# EAGLE board Daughter Card v6-2 (EAGLE 7.7.0)
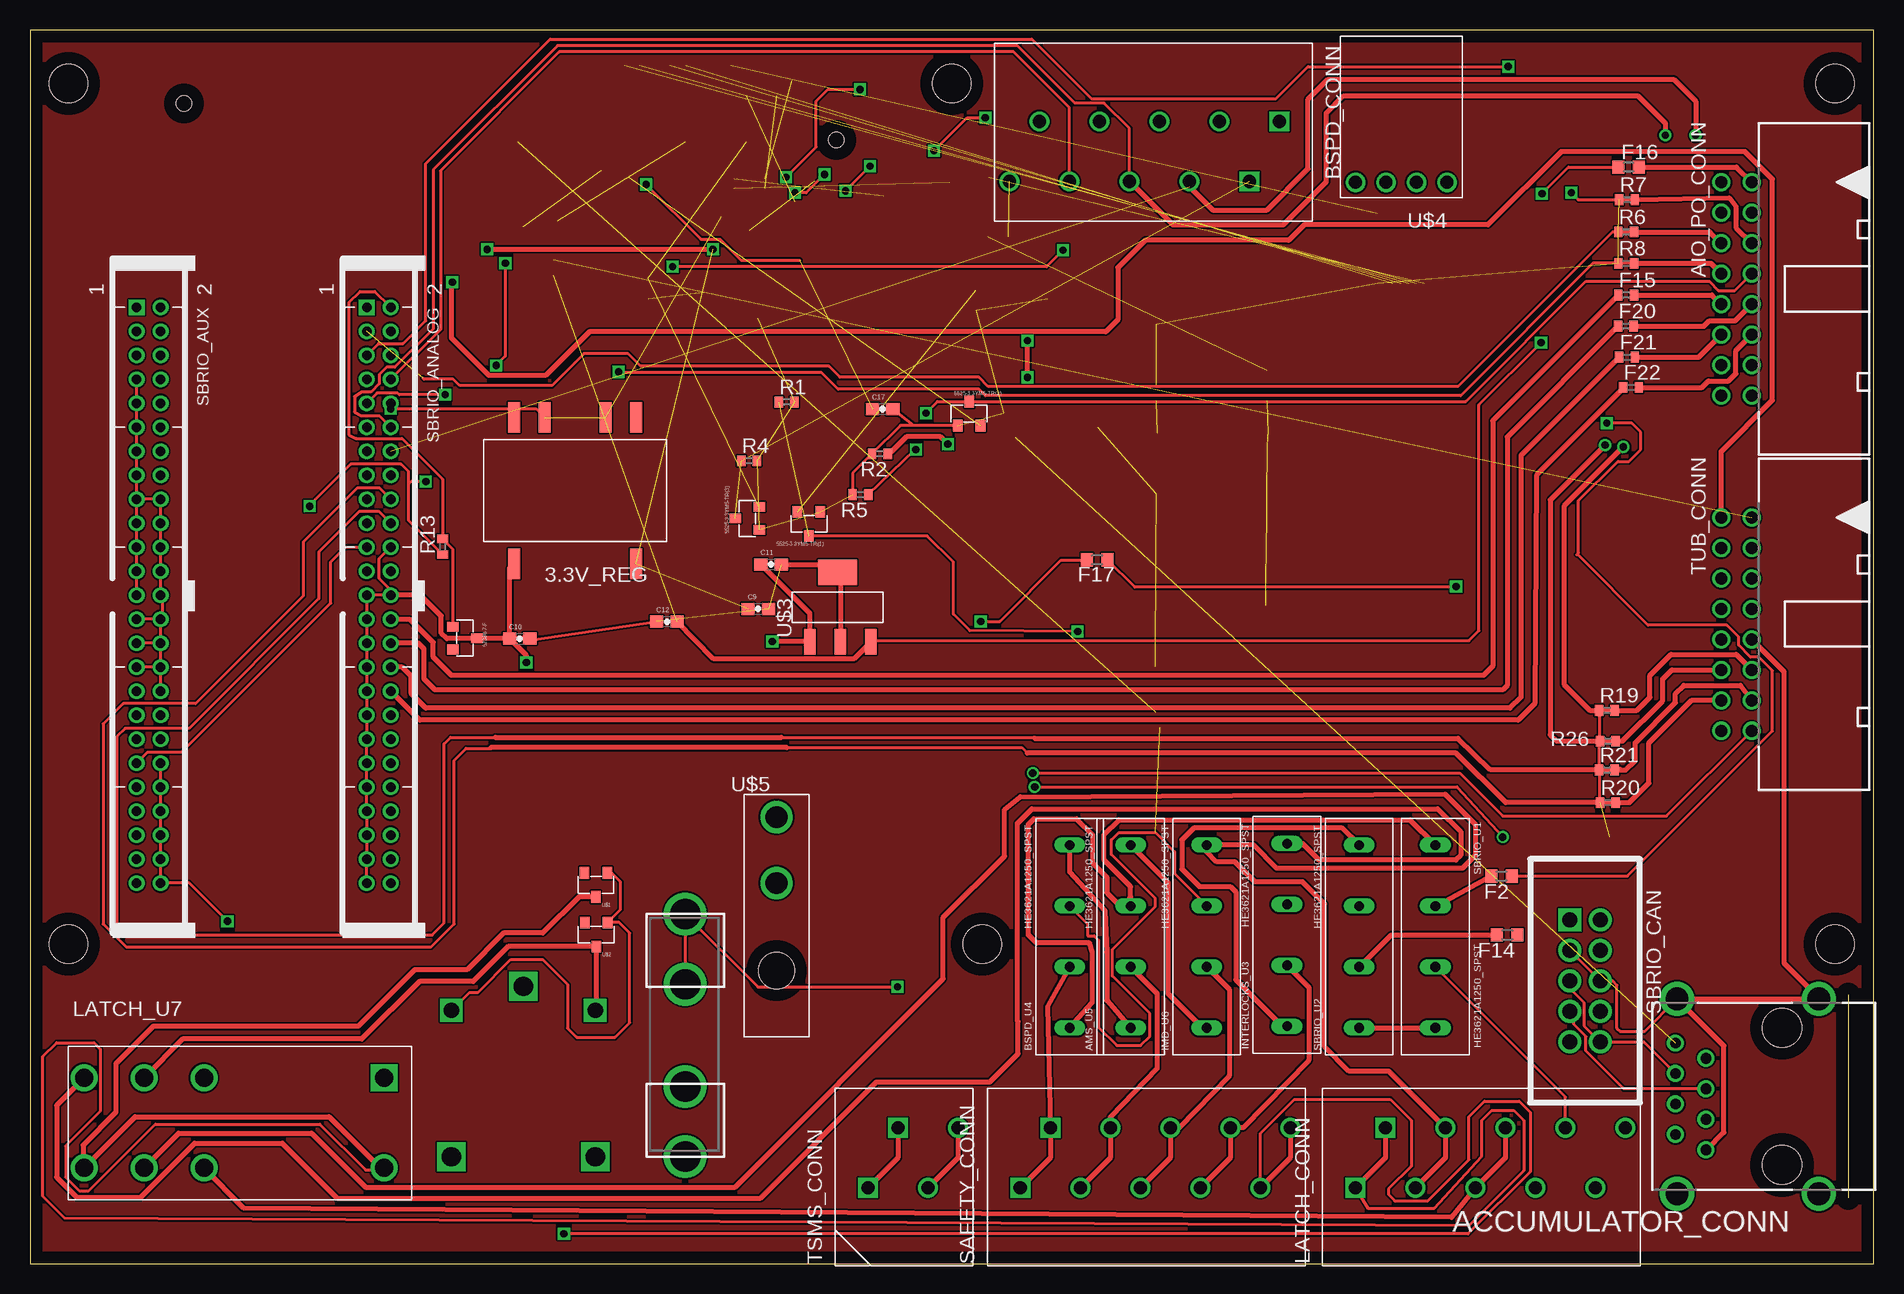
[diagram p0: board, top side]
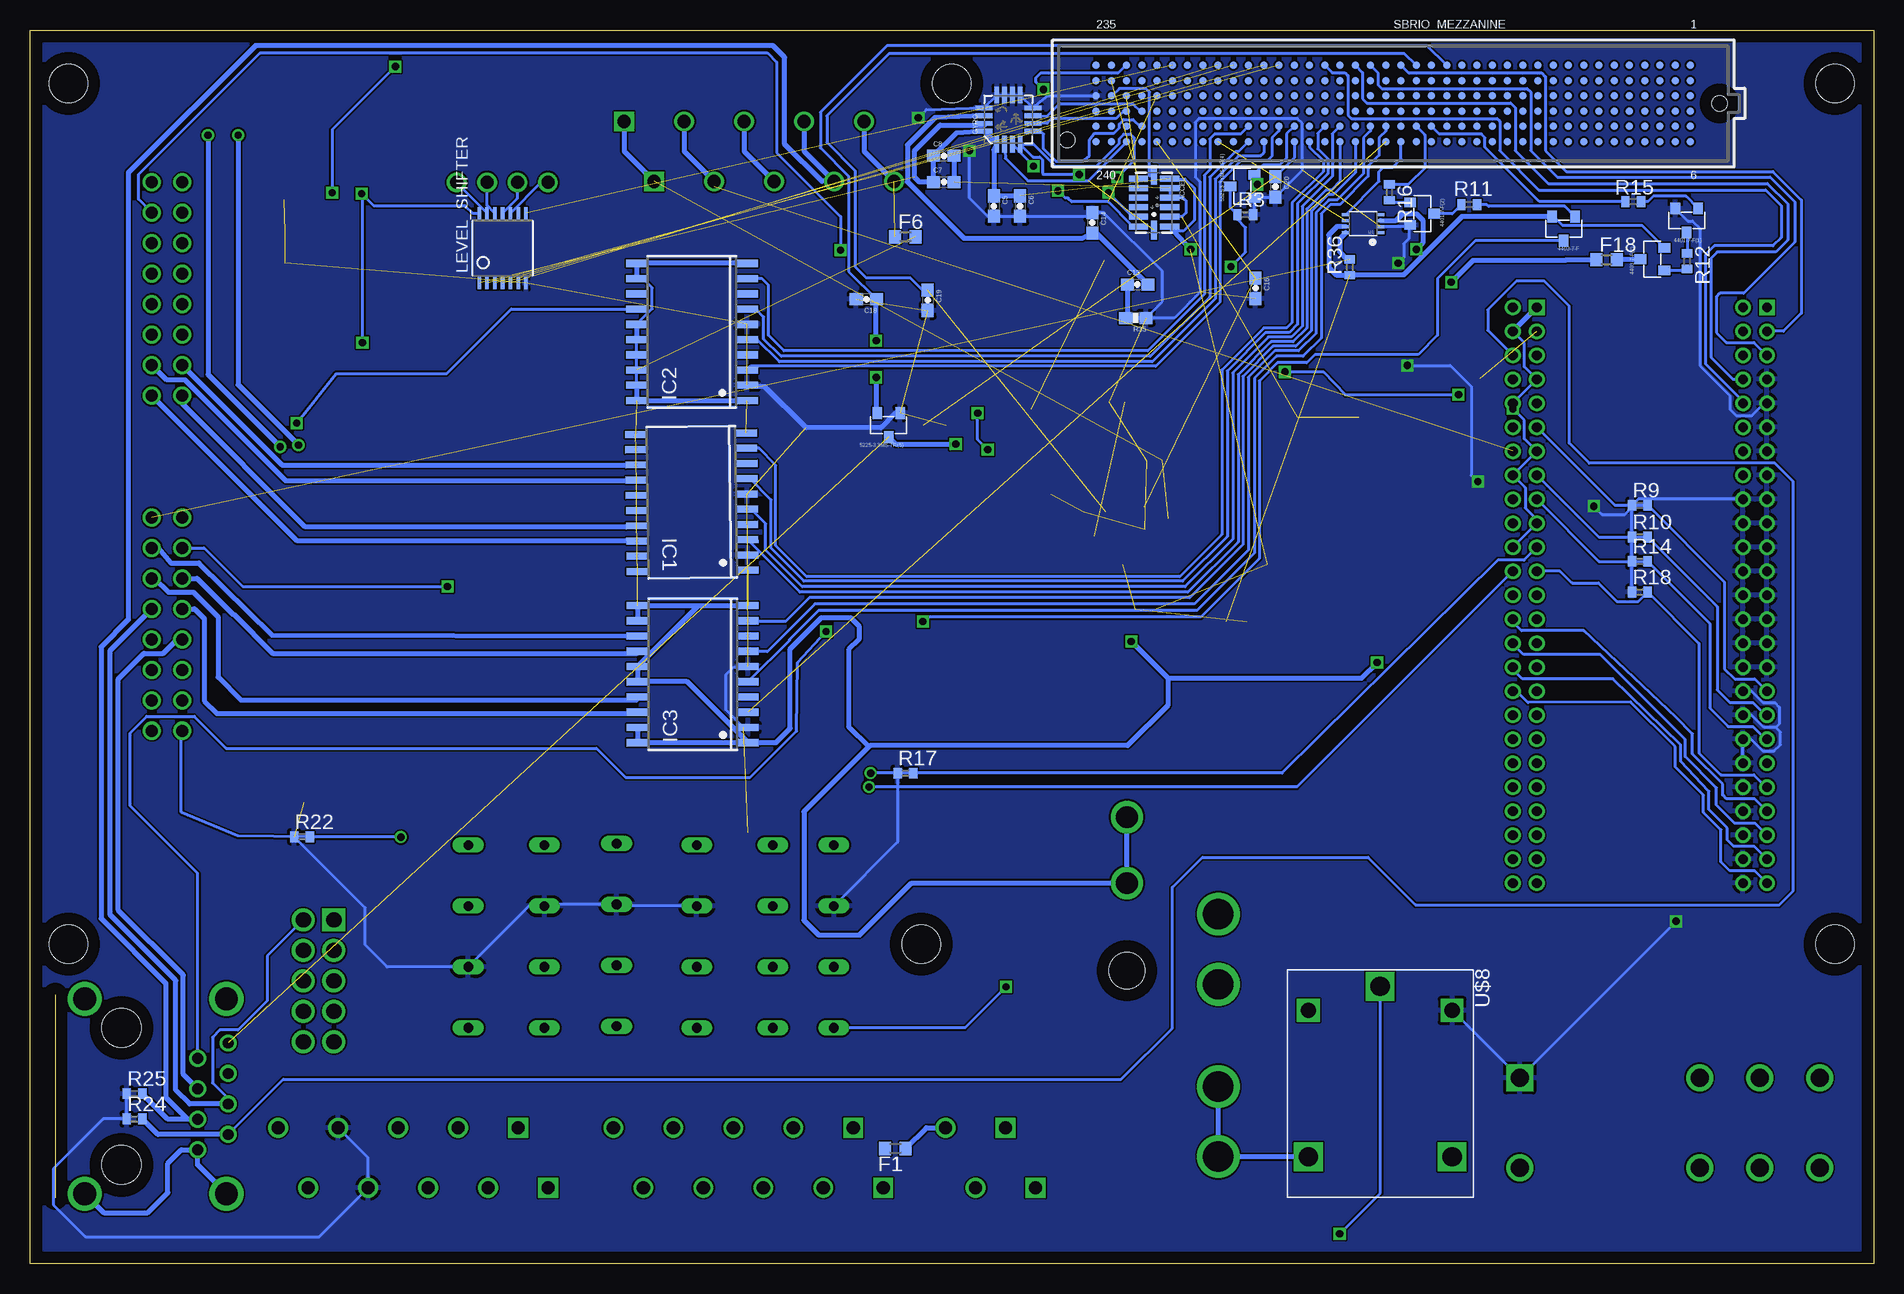
[diagram p1: board, bottom side, seen from below]

Size 153.67 x 102.87 mm. Coordinates in mm from the lower left corner, seen from the top.
Outline: 0,0 153.67,0 153.67,102.87 0,102.87 0,0
Copper layers (1*16): Top 0.035mm / dielectric 1.5mm / Bottom 0.035mm
Design rules "default *": minimum track width 8mil, minimum drill 13mil, track to track 6mil, track to pad 6mil, pad to pad 8mil, via to via 8mil, smd to smd 8mil, copper to edge 40mil, drill to drill 8mil, minimum pad ring 10mil, minimum via ring 8mil, stop-mask expansion 4mil, vias tented up to drill 0mil, thermal gap 10mil
Holes 3.17 mm at 3.2,98.4 76.83,98.4 150.47,98.4 150.47,26.67 79.38,26.67 3.2,26.67

## Footprints (pad centres in the part's own frame; a part is rotated, then mirrored left to right if it is on the bottom)
V78XX-1000 = smd 1 x 2.54: 1 -5.08,-6.096; 5 5.08,-6.096; 6 5.08,6.096; 7 2.54,6.096; 9 -2.54,6.096; 10 -5.08,6.096
SOT-23-3 = smd 0.8 x 0.976: P$1 0,1; P$2 -0.95,-1; P$3 0.95,-1
LGA14 = smd 0.5 x 1.6: 1 2,1.3; 2 1.2,1.3; 3 0.4,1.3; 4 -0.4,1.3; 5 -1.2,1.3; 6 -2,1.3; 8 -2,-1.3; 9 -1.2,-1.3; 10 -0.4,-1.3; 11 0.4,-1.3; 12 1.2,-1.3; 13 2,-1.3 | smd 1.6 x 0.5: 7 -2.3,0; 14 2.3,0
RJ45-SHIELD1 = drill 0.9 pad 1.4: 1 -4.445,6.35; 2 -3.175,8.89; 3 -1.905,6.35; 4 -0.635,8.89; 5 0.635,6.35; 6 1.905,8.89; 7 3.175,6.35; 8 4.445,8.89 | drill 1.9 pad 2.5: S1 -8.128,-3.048; S2 8.128,-3.048; S3 -8.128,8.76; S4 8.128,8.76 | hole 3.251: -5.715,0; 5.715,0
PAK100/2500-5-16 = drill 1 pad 1.422: 1 -8.89,-1.27; 2 -8.89,1.27; 3 -6.35,-1.27; 4 -6.35,1.27; 5 -3.81,-1.27; 6 -3.81,1.27; 7 -1.27,-1.27; 8 -1.27,1.27; 9 1.27,-1.27; 10 1.27,1.27; 11 3.81,-1.27; 12 3.81,1.27; 13 6.35,-1.27; 14 6.35,1.27; 15 8.89,-1.27; 16 8.89,1.27
HE3621A1250_SPST = drill 0.8 long: C+ -2.54,0; C- 2.54,0; S1 -7.62,0; S2 7.62,0
CONNECTOR_5 = drill 1.1 square: 1 0,0; 2 2.5,5 | drill 1.1: 3 5,0; 4 7.5,5; 5 10,0; 6 12.5,5; 7 15,0; 8 17.5,5; 9 20,0; 10 22.5,5
0603-CAP = smd 1.1 x 1: 1 -0.85,0; 2 0.85,0
R0603 = smd 1 x 1.1: 1 -0.85,0; 2 0.85,0
FUSE_5MM = drill 2.54 pad 3.556: 1 0,-10.1; 2 0,-4.258; 3 0,4.258; 4 0,10.1
R0402 = smd 0.7 x 0.9: 1 -0.65,0; 2 0.65,0
LGA16-4X4 = smd 1.4 x 0.4: 1 -2.05,0.975; 2 -2.05,0.325; 3 -2.05,-0.325; 4 -2.05,-0.975; 9 2.05,-0.975; 10 2.05,-0.325; 11 2.05,0.325; 12 2.05,0.975 | smd 0.4 x 1.4: 5 -0.975,-2.05; 6 -0.325,-2.05; 7 0.325,-2.05; 8 0.975,-2.05; 13 0.975,2.05; 14 0.325,2.05; 15 -0.325,2.05; 16 -0.975,2.05
PG-DSO-20 = smd 0.6 x 1.8: 1 -5.715,-4.6; 2 -4.445,-4.6; 3 -3.175,-4.6; 4 -1.905,-4.6; 5 -0.635,-4.6; 6 0.635,-4.6; 7 1.905,-4.6; 8 3.175,-4.6; 9 4.445,-4.6; 10 5.715,-4.6; 11 5.715,4.6; 12 4.445,4.6; 13 3.175,4.6; 14 1.905,4.6; 15 0.635,4.6; 16 -0.635,4.6; 17 -1.905,4.6; 18 -3.175,4.6; 19 -4.445,4.6; 20 -5.715,4.6
DPDT_JW2_FORM_C = drill 1.5: CENTER_1 -8,3.75; CENTER_2 -8,-3.75; COIL_2 12,-3.75; NC_1 -3,3.75; NC_2 -3,-3.75; NO_1 -13,3.75; NO_2 -13,-3.75 | drill 1.5 square: COIL_1 12,3.75
TSSOP14 = smd 0.305 x 0.991: 1 -1.95,-2.918; 2 -1.3,-2.918; 3 -0.65,-2.918; 4 0,-2.918; 5 0.65,-2.918; 6 1.3,-2.918; 7 1.95,-2.918; 8 1.95,2.918; 9 1.3,2.918; 10 0.65,2.918; 11 0,2.918; 12 -0.65,2.918; 13 -1.3,2.918; 14 -1.95,2.918
0603-RES = smd 1.1 x 1: 1 -0.85,0; 2 0.85,0
SBRIO_J502_J503 = drill 0.8 square: P$1 0,0 | drill 0.8: P$2 0,2; P$3 2,0; P$4 2,2; P$5 4,0; P$6 4,2; P$7 6,0; P$8 6,2; P$9 8,0; P$10 8,2; P$11 10,0; P$12 10,2; P$13 12,0; P$14 12,2; P$15 14,0; P$16 14,2; P$17 16,0; P$18 16,2; P$19 18,0; P$20 18,2; P$21 20,0; P$22 20,2; P$23 22,0; P$24 22,2; P$25 24,0; P$26 24,2; P$27 26,0; P$28 26,2; P$29 28,0; P$30 28,2; P$31 30,0; P$32 30,2; P$33 32,0; P$34 32,2; P$35 34,0; P$36 34,2; P$37 36,0; P$38 36,2; P$39 38,0; P$40 38,2; P$41 40,0; P$42 40,2; P$43 42,0; P$44 42,2; P$45 44,0; P$46 44,2; P$47 46,0; P$48 46,2; P$49 48,0; P$50 48,2
SBRIO_W = drill 1.27 pad 1.778 square: P$1 -5.08,-1.27 | drill 1.27 pad 1.778: P$2 -5.08,1.27; P$3 -2.54,-1.27; P$4 -2.54,1.27; P$5 0,-1.27; P$6 0,1.27; P$7 2.54,-1.27; P$8 2.54,1.27; P$9 5.08,-1.27; P$10 5.08,1.27
SEAM-40-XX.X-XX-06-X-A = smd 0.635 x 0.635: 1 24.765,3.175; 2 24.765,1.905; 3 24.765,0.635; 4 24.765,-0.635; 5 24.765,-1.905; 6 24.765,-3.175; 7 23.495,3.175; 8 23.495,1.905; 9 23.495,0.635; 10 23.495,-0.635; 11 23.495,-1.905; 12 23.495,-3.175; 13 22.225,3.175; 14 22.225,1.905; 15 22.225,0.635; 16 22.225,-0.635; 17 22.225,-1.905; 18 22.225,-3.175; 19 20.955,3.175; 20 20.955,1.905; 21 20.955,0.635; 22 20.955,-0.635; 23 20.955,-1.905; 24 20.955,-3.175; 25 19.685,3.175; 26 19.685,1.905; 27 19.685,0.635; 28 19.685,-0.635; 29 19.685,-1.905; 30 19.685,-3.175; 31 18.415,3.175; 32 18.415,1.905; 33 18.415,0.635; 34 18.415,-0.635; 35 18.415,-1.905; 36 18.415,-3.175; 37 17.145,3.175; 38 17.145,1.905; 39 17.145,0.635; 40 17.145,-0.635; 41 17.145,-1.905; 42 17.145,-3.175; 43 15.875,3.175; 44 15.875,1.905; 45 15.875,0.635; 46 15.875,-0.635; 47 15.875,-1.905; 48 15.875,-3.175; 49 14.605,3.175; 50 14.605,1.905; 51 14.605,0.635; 52 14.605,-0.635; 53 14.605,-1.905; 54 14.605,-3.175; 55 13.335,3.175; 56 13.335,1.905; 57 13.335,0.635; 58 13.335,-0.635; 59 13.335,-1.905; 60 13.335,-3.175; 61 12.065,3.175; 62 12.065,1.905; 63 12.065,0.635; 64 12.065,-0.635; 65 12.065,-1.905; 66 12.065,-3.175; 67 10.795,3.175; 68 10.795,1.905; 69 10.795,0.635; 70 10.795,-0.635; 71 10.795,-1.905; 72 10.795,-3.175; 73 9.525,3.175; 74 9.525,1.905; 75 9.525,0.635; 76 9.525,-0.635; 77 9.525,-1.905; 78 9.525,-3.175; 79 8.255,3.175; 80 8.255,1.905; 81 8.255,0.635; 82 8.255,-0.635; 83 8.255,-1.905; 84 8.255,-3.175; 85 6.985,3.175; 86 6.985,1.905; 87 6.985,0.635; 88 6.985,-0.635; 89 6.985,-1.905; 90 6.985,-3.175; 91 5.715,3.175; 92 5.715,1.905; 93 5.715,0.635; 94 5.715,-0.635; 95 5.715,-1.905; 96 5.715,-3.175; 97 4.445,3.175; 98 4.445,1.905; 99 4.445,0.635; 100 4.445,-0.635; 101 4.445,-1.905; 102 4.445,-3.175; 103 3.175,3.175; 104 3.175,1.905; 105 3.175,0.635; 106 3.175,-0.635; 107 3.175,-1.905; 108 3.175,-3.175; 109 1.905,3.175; 110 1.905,1.905; 111 1.905,0.635; 112 1.905,-0.635; 113 1.905,-1.905; 114 1.905,-3.175; 115 0.635,3.175; 116 0.635,1.905; 117 0.635,0.635; 118 0.635,-0.635; 119 0.635,-1.905; 120 0.635,-3.175; 121 -0.635,3.175; 122 -0.635,1.905; 123 -0.635,0.635; 124 -0.635,-0.635; 125 -0.635,-1.905; 126 -0.635,-3.175; 127 -1.905,3.175; 128 -1.905,1.905; 129 -1.905,0.635; 130 -1.905,-0.635; 131 -1.905,-1.905; 132 -1.905,-3.175; 133 -3.175,3.175; 134 -3.175,1.905; 135 -3.175,0.635; 136 -3.175,-0.635; 137 -3.175,-1.905; 138 -3.175,-3.175; 139 -4.445,3.175; 140 -4.445,1.905; 141 -4.445,0.635; 142 -4.445,-0.635; 143 -4.445,-1.905; 144 -4.445,-3.175; 145 -5.715,3.175; 146 -5.715,1.905; 147 -5.715,0.635; 148 -5.715,-0.635; 149 -5.715,-1.905; 150 -5.715,-3.175; 151 -6.985,3.175; 152 -6.985,1.905; 153 -6.985,0.635; 154 -6.985,-0.635; 155 -6.985,-1.905; 156 -6.985,-3.175; 157 -8.255,3.175; 158 -8.255,1.905; 159 -8.255,0.635; 160 -8.255,-0.635; 161 -8.255,-1.905; 162 -8.255,-3.175; 163 -9.525,3.175; 164 -9.525,1.905; 165 -9.525,0.635; 166 -9.525,-0.635; 167 -9.525,-1.905; 168 -9.525,-3.175; 169 -10.795,3.175; 170 -10.795,1.905; 171 -10.795,0.635; 172 -10.795,-0.635; 173 -10.795,-1.905; 174 -10.795,-3.175; 175 -12.065,3.175; 176 -12.065,1.905; 177 -12.065,0.635; 178 -12.065,-0.635; 179 -12.065,-1.905; 180 -12.065,-3.175; 181 -13.335,3.175; 182 -13.335,1.905; 183 -13.335,0.635; 184 -13.335,-0.635; 185 -13.335,-1.905; 186 -13.335,-3.175; 187 -14.605,3.175; 188 -14.605,1.905; 189 -14.605,0.635; 190 -14.605,-0.635; 191 -14.605,-1.905; 192 -14.605,-3.175; 193 -15.875,3.175; 194 -15.875,1.905; 195 -15.875,0.635; 196 -15.875,-0.635; 197 -15.875,-1.905; 198 -15.875,-3.175; 199 -17.145,3.175; 200 -17.145,1.905; 201 -17.145,0.635; 202 -17.145,-0.635; 203 -17.145,-1.905; 204 -17.145,-3.175; 205 -18.415,3.175; 206 -18.415,1.905; 207 -18.415,0.635; 208 -18.415,-0.635; 209 -18.415,-1.905; 210 -18.415,-3.175; 211 -19.685,3.175; 212 -19.685,1.905; 213 -19.685,0.635; 214 -19.685,-0.635; 215 -19.685,-1.905; 216 -19.685,-3.175; 217 -20.955,3.175; 218 -20.955,1.905; 219 -20.955,0.635; 220 -20.955,-0.635; 221 -20.955,-1.905; 222 -20.955,-3.175; 223 -22.225,3.175; 224 -22.225,1.905; 225 -22.225,0.635; 226 -22.225,-0.635; 227 -22.225,-1.905; 228 -22.225,-3.175; 229 -23.495,3.175; 230 -23.495,1.905; 231 -23.495,0.635; 232 -23.495,-0.635; 233 -23.495,-1.905; 234 -23.495,-3.175; 235 -24.765,3.175; 236 -24.765,1.905; 237 -24.765,0.635; 238 -24.765,-0.635; 239 -24.765,-1.905; 240 -24.765,-3.175 | hole 1.27: 27.191,0; -27.191,-3.048
CONNECTOR_2 = drill 1.1 square: 1 0,0; 2 2.5,5 | drill 1.1: 3 5,0; 4 7.5,5
VFSOP-8 = smd 0.25 x 0.65: P$1 -0.75,-1.45; P$2 -0.25,-1.45; P$3 0.25,-1.45; P$4 0.75,-1.45; P$5 0.75,1.45; P$6 0.25,1.45; P$7 -0.25,1.45; P$8 -0.75,1.45
SOT223-4 = smd 0.95 x 2.15: 1 -2.3,-2.9; 2 0.24,-2.9; 3 2.78,-2.9 | smd 3.25 x 2.15: 4 0,2.9
MOLEX_70553-0038 = drill 1.09: 1 -3.81,0; 2 -1.27,0; 3 1.27,0; 4 3.81,0
MOLEX_39-30-1020 = drill 1.8: 1 0,0; 2 0,5.5 | hole 3: 0,-7.3
RELAY = drill 1.6 square: A 14.199,-5.994; B 14.199,5.994; CENTER 0,0 | drill 1.27 square: V1 2.007,5.994; V2 2.007,-5.994

## Placement (x,y rotation side)
3.3V_REG  V7803-1000  [V78XX-1000]  45.44,64.47 0 top
4401-7-F(1)  MMBT4401-7-F  [SOT-23-3]  15.57,87 180 bottom
4401-7-F(2)  MMBT4401-7-F  [SOT-23-3]  37.62,87.55 270 bottom
4403-7-F  MMBT4403-7-F  [SOT-23-3]  25.83,86.31 180 bottom
4403-7-F(2)  MMBT4403-7-F  [SOT-23-3]  18.44,83.77 90 bottom
5225-3.3M5-TR(5)  MIC5225-3.3YM5-TR  [SOT-23-3]  82.09,69.93 180 bottom
5238B-7-F  MMBZ5238B-7-F  [SOT-23-3]  36.25,52.17 270 top
5525-3.3YM5-TR(1)  MIC5225-3.3YM5-TR  [SOT-23-3]  64.92,61.7 180 top
5525-3.3YM5-TR(2)  MIC5225-3.3YM5-TR  [SOT-23-3]  78.28,70.89 0 top
5525-3.3YM5-TR(3)  MIC5225-3.3YM5-TR  [SOT-23-3]  59.79,62.15 90 top
5525-3.3YM5-TR(4)  MIC5225-3.3YM5-TR  [SOT-23-3]  52.6,89.84 90 bottom
ACCEL  ADXL345  [LGA14]  59.97,88.49 270 bottom
ACCUMULATOR_CONN  RJ45-6L21-S  [RJ45-SHIELD1]  146.05,13.97 90 top
AIO_PO_CONN  2516-5  [PAK100/2500-5-16]  142.24,81.28 270 top
AMS_U5  HE3621A1250_SPST  [HE3621A1250_SPST]  91.74,27.3 90 top
BSPD_CONN  CONN_5  [CONNECTOR_5]  104.14,95.25 180 top
BSPD_U4  HE3621A1250_SPST  [HE3621A1250_SPST]  86.66,27.3 90 top
C5  .1uF  [0603-CAP]  73.33,88.19 270 bottom
C6  10uF  [0603-CAP]  71.15,88.19 270 bottom
C7  .1uF  [0603-CAP]  77.5,90.2 0 bottom
C8  1uF  [0603-CAP]  77.5,92.38 0 bottom
C9  22uF  [0603-CAP]  60.71,54.61 0 top
C10  10uF  [0603-CAP]  40.82,52.12 0 top
C11  10uF  [0603-CAP]  61.77,58.32 0 top
C12  22uF  [0603-CAP]  53.09,53.54 0 top
C13  470nF  [0603-CAP]  61.34,81.66 0 bottom
C14  10nF  [0603-CAP]  65.13,86.79 270 bottom
C16  1uF  [0603-CAP]  51.51,81.33 270 bottom
C17  1uF  [0603-CAP]  71.07,71.27 0 top
C18  1uF  [0603-CAP]  83.95,80.42 180 bottom
C19  1uF  [0603-CAP]  78.84,80.34 270 bottom
C20  1uF  [0603-CAP]  49.86,89.79 270 bottom
F1  250mA  [R0603]  81.53,9.63 180 bottom
F2  250mA  [R0603]  122.66,32.33 180 top
F3  FUSEX20MM  [FUSE_5MM]  54.61,19.05 0 top
F6  250mA  [R0603]  80.7,85.62 0 bottom
F14  250mA  [R0603]  123.14,27.43 180 top
F15  10mA PTC  [R0402]  133.05,80.77 0 top
F16  0.5A PTC  [R0603]  133.25,91.44 0 top
F17  1A PTC  [R0603]  88.95,58.7 180 top
F18  1A PTC  [R0603]  22.25,83.72 0 bottom
F20  10mA PTC  [R0402]  133.02,78.18 0 top
F21  10mA PTC  [R0402]  133.12,75.59 0 top
F22  10mA PTC  [R0402]  133.45,73.08 0 top
GYRO  L3G4200D  [LGA16-4X4]  72.11,95.4 90 bottom
IC1  BTS716G  [PG-DSO-20]  98.5,63.5 90.7 bottom
IC2  BTS716G  [PG-DSO-20]  98.5,77.7 90 bottom
IC3  BTS716G  [PG-DSO-20]  98.42,49.17 90 bottom
IMD_U6  HE3621A1250_SPST  [HE3621A1250_SPST]  98.09,27.3 90 top
INTERLOCKS_U3  HE3621A1250_SPST  [HE3621A1250_SPST]  104.78,27.43 90 top
LATCH_CONN  CONN_5  [CONNECTOR_5]  110.49,6.35 0 top
LATCH_U7  JW2SN-DC12V  [DPDT_JW2_FORM_C]  17.5,11.76 0 top
LEVEL_SHIFTER  [TSSOP14]  114.27,84.68 0 bottom
R1  10k  [R0402]  63.07,71.86 0 top
R2  10k  [R0402]  70.84,67.54 180 top
R3  10k  [R0402]  52.37,87.48 0 bottom
R4  10k  [R0402]  59.94,66.95 0 top
R5  10k  [R0402]  69.22,64.14 180 top
R6  10k  [R0402]  133.05,86.03 0 top
R7  10k  [R0402]  133.12,88.72 0 top
R8  10k  [R0402]  133.05,83.41 0 top
R9  10k  [R0402]  19.48,63.25 0 bottom
R10  10k  [R0402]  19.48,60.6 0 bottom
R11  4.7k  [R0402]  33.71,88.32 0 bottom
R12  4.7k  [R0402]  15.54,83.59 270 bottom
R13  10k  [R0402]  34.39,59.79 90 top
R14  10k  [R0402]  19.48,58.57 0 bottom
R15  4.7k  [R0402]  20.04,88.57 0 bottom
R16  4.7k  [R0402]  40.36,89.33 270 bottom
R17  10k  [R0402]  80.7,40.92 0 bottom
R18  10k  [R0402]  19.48,56.01 0 bottom
R19  10k  [R0402]  131.44,46.15 0 top
R20  10k  [R0402]  131.52,38.46 0 top
R21  10k  [R0402]  131.44,41.17 0 top
R22  10k  [R0402]  130.99,35.61 0 bottom
R24  10k  [R0402]  144.96,12.09 0 bottom
R25  10k  [R0402]  144.96,14.2 0 bottom
R26  10k  [R0402]  131.52,43.59 0 top
R35  10K  [0603-RES]  61.49,78.87 180 bottom
R36  4.7k  [R0402]  43.66,83.08 90 bottom
SAFETY_CONN  CONN_5  [CONNECTOR_5]  82.55,6.35 0 top
SBRIO_ANALOG  SBRIO_MIO  [SBRIO_J502_J503]  28.07,79.76 270 top
SBRIO_AUX  SBRIO_AUX  [SBRIO_J502_J503]  8.89,79.76 270 top
SBRIO_CAN  SBRIO_W500  [SBRIO_W]  129.62,23.6 270 top
SBRIO_MEZZANINE  SBRIO_RMC  [SEAM-40-XX.X-XX-06-X-A]  40.03,96.75 0 bottom
SBRIO_U1  HE3621A1250_SPST  [HE3621A1250_SPST]  117.14,27.3 270 top
SBRIO_U2  HE3621A1250_SPST  [HE3621A1250_SPST]  110.79,27.3 90 top
TSMS_CONN  CONN_2  [CONNECTOR_2]  69.85,6.35 0 top
TUB_CONN  2516-5  [PAK100/2500-5-16]  142.24,53.34 270 top
U1  [VFSOP-8]  42.55,86.74 90 bottom
U$1  DIODE_MMBD4448  [SOT-23-3]  47.17,31.6 180 top
U$2  DIODE_MMBD4448  [SOT-23-3]  47.19,27.46 180 top
U$3  LM340MP-5.0  [SOT223-4]  67.31,54.76 0 top
U$4  70553-0038  [MOLEX_70553-0038]  114.3,90.17 180 top
U$5  39-30-1020  [MOLEX_39-30-1020]  62.23,31.75 0 top
U$8  RELAY  [RELAY]  41.12,23.14 270 bottom

## Library data of the parts
3.3V_REG 4401-7-F(1) 4401-7-F(2) 4403-7-F 4403-7-F(2) 5238B-7-F AMS_U5 BSPD_CONN BSPD_U4 IMD_U6 INTERLOCKS_U3 LATCH_CONN LATCH_U7 SAFETY_CONN SBRIO_ANALOG SBRIO_AUX SBRIO_CAN SBRIO_U1 SBRIO_U2 TSMS_CONN U$1 U$2 U$8 = formula electric
5225-3.3M5-TR(5) 5525-3.3YM5-TR(1) 5525-3.3YM5-TR(2) 5525-3.3YM5-TR(3) 5525-3.3YM5-TR(4) = formula electric; DIGIKEYPN: MCP1703T-3302E/CBCT-ND
ACCEL GYRO = SparkFun-Sensors
ACCUMULATOR_CONN = con-tycoelectronics; OC_FARNELL: unknown; OC_NEWARK: unknown
AIO_PO_CONN TUB_CONN = con-3m; MPN: D2516-5002-AR; OC_FARNELL: 9838376; OC_NEWARK: 12P7055
C5-C14 C16-C20 F3 R35 = SparkFun-Passives
F1 F2 F6 F14-F18 F20-F22 R1-R22 R24-R26 R36 = resistor
IC1-IC3 = infineon; OC_FARNELL: unknown; OC_NEWARK: unknown
LEVEL_SHIFTER = SparkFun-DigitalIC
SBRIO_MEZZANINE = SEAM-40-XX.X-XX-06-X-A
U1 = adafruit
U$3 = texas
U$4 U$5 = molex

## Nets
3.3V: 3.3V_REG.5 ACCEL.1 ACCEL.6 C5.1 C6.1 C7.1 C8.1 C9.1 GYRO.1 GYRO.15 GYRO.16 LEVEL_SHIFTER.1 U1.P$3
5V: 4403-7-F(2).P$3 4403-7-F.P$3 C12.2 F16.1 LEVEL_SHIFTER.14 R36.1 U1.P$7 U$3.3
5V_IO_1: F17.1 TUB_CONN.3
12V: 3.3V_REG.1 5238B-7-F.P$1 C10.1 C11.1 IC1.1 IC1.10 IC1.11 IC1.12 IC1.15 IC1.16 IC1.19 IC1.20 IC2.1 IC2.10 IC2.11 IC2.12 IC2.15 IC2.16 IC2.19 IC2.20 IC3.1 IC3.10 IC3.11 IC3.12 IC3.15 IC3.16 IC3.19 IC3.20 U$3.1 U$5.1 U$5.2
ACCUMULATOR_FANS: AIO_PO_CONN.16 IC1.18
AI1: ACCUMULATOR_CONN.2 R24.2 SBRIO_ANALOG.P$6
AI2: ACCUMULATOR_CONN.3 BSPD_CONN.7 BSPD_CONN.8 R25.2 SBRIO_ANALOG.P$8
AI7: R22.2 SBRIO_ANALOG.P$24 TUB_CONN.15
AI8: AIO_PO_CONN.5 R6.2 SBRIO_ANALOG.P$3
AI9: AIO_PO_CONN.6 R7.2 SBRIO_ANALOG.P$5
AI10: AIO_PO_CONN.7 R8.2 SBRIO_ANALOG.P$9
AI11: R9.2 SBRIO_ANALOG.P$11 SBRIO_AUX.P$33
AI12: R10.2 SBRIO_ANALOG.P$15 SBRIO_AUX.P$35
AI13: R14.2 SBRIO_ANALOG.P$17 SBRIO_AUX.P$37
AI15: R18.2 SBRIO_ANALOG.P$23 SBRIO_AUX.P$41
AMS_OK-: AMS_U5.C+ SAFETY_CONN.3 SAFETY_CONN.4
AMS_OK_IN: 5525-3.3YM5-TR(1).P$1 ACCUMULATOR_CONN.7 R1.1
AMS_OUT: IC3.17 TUB_CONN.6
AO0: F15.1 SBRIO_ANALOG.P$28 SBRIO_AUX.P$43
AO1: F20.1 SBRIO_ANALOG.P$30 SBRIO_AUX.P$45
AO2: F21.1 SBRIO_ANALOG.P$32 SBRIO_AUX.P$47
AO3: F22.1 SBRIO_ANALOG.P$34 SBRIO_AUX.P$49
BRAKE_PRESS_IN_1: BSPD_CONN.5 BSPD_CONN.6 R26.2 SBRIO_ANALOG.P$12 TUB_CONN.11
BRAKE_PRESS_IN_2: BSPD_CONN.3 BSPD_CONN.4 R19.2 SBRIO_ANALOG.P$14 TUB_CONN.12
BSPD_OK+: BSPD_U4.C+ SAFETY_CONN.1 SAFETY_CONN.2
BSPD_OK_IN: 5525-3.3YM5-TR(3).P$1 BSPD_CONN.1 BSPD_CONN.2 R4.1
BSPD_OUT: IC3.13 TUB_CONN.4
BUZZER_OUT: IC3.18 TUB_CONN.7
CAN_GND: ACCUMULATOR_CONN.1 ACCUMULATOR_CONN.S1 ACCUMULATOR_CONN.S2 ACCUMULATOR_CONN.S3 ACCUMULATOR_CONN.S4 SBRIO_CAN.P$3 SBRIO_CAN.P$6 TUB_CONN.10
CAN_H: ACCUMULATOR_CONN.5 SBRIO_CAN.P$7 TUB_CONN.9
CAN_L: ACCUMULATOR_CONN.4 SBRIO_CAN.P$2 TUB_CONN.8
DC_DC_DISABLE: F18.1 TUB_CONN.1
DIO0: ACCEL.14 GYRO.2 SBRIO_MEZZANINE.228
DIO1: 5525-3.3YM5-TR(3).P$3 C16.1 SBRIO_MEZZANINE.216
DIO2: SBRIO_MEZZANINE.210
DIO3: SBRIO_MEZZANINE.198
DIO4: SBRIO_MEZZANINE.192 U1.P$6
DIO5: IC2.7 SBRIO_MEZZANINE.180
DIO6: IC2.5 SBRIO_MEZZANINE.174
DIO7: 5525-3.3YM5-TR(2).P$3 C20.1 SBRIO_MEZZANINE.162
DIO8: IC1.9 SBRIO_MEZZANINE.156
DIO9: IC1.3 SBRIO_MEZZANINE.144
DIO10: IC3.9 SBRIO_MEZZANINE.138
DIO11: IC3.3 SBRIO_MEZZANINE.126
DIO12: SBRIO_MEZZANINE.120 U1.P$5
DIO13: SBRIO_MEZZANINE.108
DIO14: SBRIO_MEZZANINE.102
DIO15: SBRIO_MEZZANINE.90
DIO16: ACCEL.7 SBRIO_MEZZANINE.231
DIO17: ACCEL.9 SBRIO_MEZZANINE.225
DIO18: ACCEL.13 GYRO.3 SBRIO_MEZZANINE.213
DIO19: SBRIO_MEZZANINE.207
DIO20: SBRIO_MEZZANINE.195
DIO21: SBRIO_MEZZANINE.189
DIO22: SBRIO_MEZZANINE.177
DIO23: SBRIO_MEZZANINE.171
DIO24: SBRIO_MEZZANINE.159
DIO25: SBRIO_MEZZANINE.153
DIO26: SBRIO_MEZZANINE.141
DIO27: SBRIO_MEZZANINE.135
DIO28: SBRIO_MEZZANINE.123
DIO29: SBRIO_MEZZANINE.117
DIO30: SBRIO_MEZZANINE.105
DIO31: SBRIO_MEZZANINE.99
DIO32: GYRO.5 SBRIO_MEZZANINE.221
DIO33: SBRIO_MEZZANINE.215
DIO34: SBRIO_MEZZANINE.203
DIO35: SBRIO_MEZZANINE.197
DIO36: SBRIO_MEZZANINE.185
DIO37: IC2.9 SBRIO_MEZZANINE.179
DIO38: IC2.3 SBRIO_MEZZANINE.167
DIO39: 5525-3.3YM5-TR(4).P$3 C17.1 SBRIO_MEZZANINE.161
DIO40: IC1.7 SBRIO_MEZZANINE.149
DIO41: IC1.5 SBRIO_MEZZANINE.143
DIO42: IC3.7 SBRIO_MEZZANINE.131
DIO43: IC3.5 SBRIO_MEZZANINE.125
DIO44: R16.1 SBRIO_MEZZANINE.113
DIO45: R15.1 SBRIO_MEZZANINE.107
DIO48: ACCEL.8 SBRIO_MEZZANINE.230
DIO64: GYRO.6 SBRIO_MEZZANINE.226
DIO65: GYRO.7 SBRIO_MEZZANINE.220
DIO80: SBRIO_MEZZANINE.235
DIO81: ACCEL.12 GYRO.4 SBRIO_MEZZANINE.223
DIO82: SBRIO_MEZZANINE.217
DIO83: LEVEL_SHIFTER.8 SBRIO_MEZZANINE.205
DIO84: SBRIO_MEZZANINE.199
DIO85: LEVEL_SHIFTER.5 SBRIO_MEZZANINE.187
DIO86: LEVEL_SHIFTER.4 SBRIO_MEZZANINE.181
DIO87: LEVEL_SHIFTER.3 SBRIO_MEZZANINE.169
DIO88: LEVEL_SHIFTER.2 SBRIO_MEZZANINE.163
DIO89: SBRIO_AUX.P$12
DIO90: SBRIO_AUX.P$10 SBRIO_MEZZANINE.145
DIO91: SBRIO_AUX.P$8 SBRIO_MEZZANINE.133
DIO92: SBRIO_AUX.P$5 SBRIO_MEZZANINE.127
DIO93: SBRIO_AUX.P$3 SBRIO_MEZZANINE.115
DIO94: 5525-3.3YM5-TR(1).P$3 C19.1 SBRIO_MEZZANINE.109
DIO95: 5225-3.3M5-TR(5).P$3 C18.1 SBRIO_MEZZANINE.97
DIO_GND: 3.3V_REG.7 3.3V_REG.9 ACCEL.2 ACCEL.4 ACCEL.5 C7.2 C8.2 C9.2 C10.2 C11.2 C12.1 SBRIO_ANALOG.P$1 SBRIO_ANALOG.P$4 SBRIO_ANALOG.P$7 SBRIO_ANALOG.P$10 SBRIO_ANALOG.P$13 SBRIO_ANALOG.P$16 SBRIO_ANALOG.P$19 SBRIO_ANALOG.P$22 SBRIO_ANALOG.P$25 SBRIO_ANALOG.P$26 SBRIO_ANALOG.P$27 SBRIO_ANALOG.P$29 SBRIO_ANALOG.P$31 SBRIO_ANALOG.P$33 SBRIO_ANALOG.P$35 SBRIO_ANALOG.P$37 SBRIO_ANALOG.P$39 SBRIO_ANALOG.P$41 SBRIO_ANALOG.P$43 SBRIO_ANALOG.P$45 SBRIO_ANALOG.P$47 SBRIO_ANALOG.P$49 U$3.2 U$3.4
E-STOP_OK: 5525-3.3YM5-TR(4).P$1 AIO_PO_CONN.4 R3.1
GLV+: AMS_U5.C- BSPD_U4.S1 F3.3 F3.4 SBRIO_U1.S1
GND: 4401-7-F(1).P$3 4401-7-F(2).P$3 5225-3.3M5-TR(5).P$2 5525-3.3YM5-TR(1).P$2 5525-3.3YM5-TR(2).P$2 5525-3.3YM5-TR(3).P$2 5525-3.3YM5-TR(4).P$2 BSPD_U4.C- C5.2 C6.2 C14.1 C16.2 C17.2 C18.2 C19.2 C20.2 GYRO.8 GYRO.9 GYRO.10 GYRO.11 GYRO.12 GYRO.13 IC1.2 IC1.6 IC2.2 IC2.6 IC3.2 IC3.6 IMD_U6.C- INTERLOCKS_U3.C- LATCH_CONN.7 LATCH_CONN.8 LATCH_U7.COIL_1 LEVEL_SHIFTER.7 R1.2 R2.2 R3.2 R4.2 R5.2 R6.1 R7.1 R8.1 R9.1 R10.1 R13.1 R14.1 R17.1 R18.1 R19.1 R20.1 R21.1 R22.1 R24.1 R25.1 R26.1 R35.1 SBRIO_AUX.P$7 SBRIO_AUX.P$9 SBRIO_AUX.P$11 SBRIO_AUX.P$13 SBRIO_AUX.P$15 SBRIO_AUX.P$17 SBRIO_AUX.P$18 SBRIO_AUX.P$19 SBRIO_AUX.P$20 SBRIO_AUX.P$21 SBRIO_AUX.P$22 SBRIO_AUX.P$23 SBRIO_AUX.P$24 SBRIO_AUX.P$25 SBRIO_AUX.P$26 SBRIO_AUX.P$27 SBRIO_AUX.P$28 SBRIO_AUX.P$29 SBRIO_AUX.P$30 SBRIO_AUX.P$31 SBRIO_AUX.P$32 SBRIO_AUX.P$34 SBRIO_AUX.P$36 SBRIO_AUX.P$38 SBRIO_AUX.P$40 SBRIO_AUX.P$42 SBRIO_AUX.P$44 SBRIO_AUX.P$46 SBRIO_AUX.P$48 SBRIO_AUX.P$50 SBRIO_MEZZANINE.237 SBRIO_U1.C- SBRIO_U2.C- U1.P$2 U$1.P$2 U$2.P$2 U$8.V1
IMD_OK+: IMD_U6.C+ SAFETY_CONN.5 SAFETY_CONN.6
IMD_OK_IN: 5225-3.3M5-TR(5).P$1 ACCUMULATOR_CONN.8 R2.1
IMD_OUT: IC3.14 TUB_CONN.5
INTER_OK+: INTERLOCKS_U3.C+ SAFETY_CONN.7 SAFETY_CONN.8
LAP_TIMER_IN: R36.2 TUB_CONN.2 U1.P$8
LATCH_LED+: LATCH_CONN.5 LATCH_CONN.6 LATCH_U7.NC_2
LATCH_OK: 5525-3.3YM5-TR(2).P$1 AIO_PO_CONN.8 R5.1
LATCH_SW_IN: LATCH_CONN.1 LATCH_CONN.2 LATCH_U7.COIL_2 LATCH_U7.NO_2 U$1.P$1
LATCH_SW_OUT: IMD_U6.S2 LATCH_CONN.3 LATCH_CONN.4 LATCH_U7.CENTER_2
N$2: SBRIO_U1.S2 SBRIO_U2.S1
N$3: AIO_PO_CONN.9 F15.2
N$4: 5238B-7-F.P$2 R13.2 SBRIO_ANALOG.P$2
N$6: AIO_PO_CONN.10 F20.2
N$7: INTERLOCKS_U3.S1 SBRIO_U2.S2
N$8: AMS_U5.S1 BSPD_U4.S2
N$9: AIO_PO_CONN.11 F21.2
N$10: AIO_PO_CONN.12 F22.2
N$13: AMS_U5.S2 IMD_U6.S1
N$14: F3.1 F3.2 U$8.A
N$20: AIO_PO_CONN.2 F16.2
N$29: AIO_PO_CONN.3
N$37: C13.2 C14.2 GYRO.14
N$38: C13.1 R35.2
N$41: BSPD_CONN.9 BSPD_CONN.10 F6.1
N$54: 4403-7-F.P$2 R11.2
N$56: 4403-7-F.P$1 F17.2
N$57: 4403-7-F(2).P$1 F18.2
N$58: 4403-7-F(2).P$2 R12.2
N$60: 4401-7-F(1).P$2 R15.2
N$61: 4401-7-F(1).P$1 R12.1
N$62: 4401-7-F(2).P$2 R16.2
N$63: 4401-7-F(2).P$1 R11.1
PO2: AIO_PO_CONN.15 IC1.17
PO3: AIO_PO_CONN.14 IC1.14
PO4: AIO_PO_CONN.13 IC1.13
PRECHARGE_DONE+: F1.1 TSMS_CONN.3 TSMS_CONN.4
SBRIO_OK+_1: F2.1 IC2.14
SBRIO_OK+_1_RELAY_IN: F2.2 SBRIO_U1.C+
SBRIO_OK+_2: F14.1
SBRIO_OK_2_RELAY: F14.2 SBRIO_U2.C+
SHIELD: ACCUMULATOR_CONN.6 SBRIO_CAN.P$5 SBRIO_CAN.P$10
SHUTDOWN_1: IC2.17
SHUTDOWN_3: IC2.13
SHUTDOWN_OK+: INTERLOCKS_U3.S2 LATCH_U7.NO_1
STEERING_POS: R17.2 SBRIO_ANALOG.P$21 SBRIO_AUX.P$39 TUB_CONN.16
THROTTLE_IN_1: R20.2 SBRIO_ANALOG.P$18 TUB_CONN.13
THROTTLE_IN_2: R21.2 SBRIO_ANALOG.P$20 TUB_CONN.14
THROTTLE_OK_OUT: F6.2 IC2.18
TSMS_IN+: TSMS_CONN.1 TSMS_CONN.2
TSMS_OUT+: SAFETY_CONN.9 SAFETY_CONN.10 U$8.CENTER
TSMS_OUT_CTRL+: LATCH_U7.CENTER_1 U$2.P$1 U$8.V2
VCC: SBRIO_MEZZANINE.236
WS1: LEVEL_SHIFTER.13 U$4.1
WS2: LEVEL_SHIFTER.12 U$4.2
WS3: LEVEL_SHIFTER.11 U$4.3
WS4: LEVEL_SHIFTER.10 U$4.4

## Tracks (layer width: path | path; a pad name or v marks a point on that pad's centre or on a via)
3.3V  (via drill 0.6)  (4 unrouted)
  Top 0.406: v38.1,84.58 v56.92,84.58
  Bottom 0.254: ACCEL.6 58.62,90.45 57.38,90.45 56.62,89.69 56.62,87.02 57.53,86.11 58.33,86.11
  Bottom 0.406: C6.1 C5.1 73.33,92.88 GYRO.1 GYRO.16 76.45,94.28 C8.1 C7.1 79.53,90.19 79.93,90.6 79.93,92.81 77.8,94.94 74.11,94.94 GYRO.15 | U1.P$3 39.81,86.99 39.24,87.55 38.1,87.55 37.57,87.02 37.57,85.11 v38.1,84.58 | v56.92,84.58 58.33,86.11 ACCEL.1
5V  (via drill 0.6)  (1 unrouted)
  Top 0.254: U$3.3 70.16,51.97 119.94,51.97 120.78,52.81 120.78,71.63 v125.96,76.81 | v126.03,89.23 128.25,91.44 F16.1
  Top 0.406: U$3.3 68.67,50.44 57,50.44 55.42,52.02 C12.2
  Bottom 0.254: v125.96,76.81 125.96,89.15 | 125.96,89.15 v126.03,89.23 | 4403-7-F(2).P$3 19.28,86.56 25.91,86.56 26.78,87.44 4403-7-F.P$3 | 125.96,89.15 125.04,88.24 117.42,88.24 116.79,87.6 LEVEL_SHIFTER.14
  Bottom 0.406: 4403-7-F.P$3 34.31,87.31 39.18,82.43 R36.1 44.79,82.43 45.41,83.06 45.41,85.8 44.73,86.49 U1.P$7
5V_IO_1  (via drill 0.6)
  Top 0.254: v118.87,56.46 118.39,56.41 92.09,56.41 F17.1
  Bottom 0.254: TUB_CONN.3 139.17,59.69 135.94,56.46 v118.87,56.46
12V  (via drill 0.6)  (9 unrouted)
  Top 0.406: C11.1 65.01,54.23 U$3.1 64.98,51.89 v61.87,51.89 | v41.38,50.14 41.38,50.71 C10.1 | C10.1 39.97,57.98 3.3V_REG.1 | C10.1 37.3,52.12 5238B-7-F.P$1
  Bottom 0.254: IC2.19 IC2.16 | IC2.15 101.8,79.63 101.8,81.38 102.56,82.14 IC2.12
  Bottom 0.406: IC2.10 IC2.11 IC2.12 | IC2.15 IC2.16 | IC2.19 IC2.20 IC2.1 | IC3.12 IC3.11 IC3.10 97.94,54.89 IC3.15 IC3.16 98.91,48.54 IC3.1 | IC3.19 IC3.20 IC3.1 | v61.87,51.89 58.83,48.84 | 58.83,48.84 58.83,46.56 62.18,43.2 83.67,43.2 83.74,43.13 | 83.74,43.13 89.15,37.72 89.15,28.65 87.94,27.43 84.51,27.43 80.19,31.75 U$5.1 U$5.2 | IC3.1 91.49,43.46 90.3,44.65 90.3,51.28 87.71,53.87 85.27,53.87 84.58,53.19 84.58,52.05 85.42,51.21 85.42,44.81 83.74,43.13 | 58.83,48.84 42.67,48.84 v41.38,50.14
ACCUMULATOR_FANS
  Bottom 0.406: IC1.18 131.39,60.27 AIO_PO_CONN.16
AI1
  Bottom 0.254: ACCUMULATOR_CONN.2 132.56,15.39 62.71,15.39 58.45,19.66 58.45,31.39 55.93,33.91 42.14,33.91 38.18,29.95 7.85,29.95 6.71,31.09 6.71,65.23 8.23,66.75 23.7,66.75 25.38,68.43 25.38,79.86 27.43,81.92 29.79,81.92 32.16,79.55 32.16,77.84 SBRIO_ANALOG.P$6
  Bottom 0.406: ACCUMULATOR_CONN.2 143.01,10.79 R24.2
AI2
  Top 0.254: BSPD_CONN.8 86.64,96.39 81.99,101.04 44.12,101.04 34.21,91.14 34.21,77.9 SBRIO_ANALOG.P$8
  Bottom 0.406: ACCUMULATOR_CONN.3 140.51,12.06 | 140.51,12.06 142.17,12.06 R25.2 | BSPD_CONN.7 89.14,92.75 BSPD_CONN.8 87.66,90.25 90.75,93.34 90.75,100.58 91.75,101.58 134.87,101.58 145.47,90.98 145.47,53.72 147.75,51.44 147.75,28.8 142.34,23.39 142.34,13.89 140.51,12.06
AI7  (via drill 0.6)
  Top 0.254: v83.74,39.78 118.95,39.78 v122.76,35.59
  Bottom 0.254: SBRIO_ANALOG.P$24 48.05,39.78 v83.74,39.78 | TUB_CONN.15 141.05,44.37 141.05,37.64 136.35,35.69 R22.2 127.31,35.61 v122.76,35.59
AI8  (1 unrouted)
  Top 0.254: R6.2 131.9,86.03 119.02,73.15 79.86,73.15 79.1,73.91 67.51,73.91 66.6,74.83 50.9,74.83 49.84,75.89 46.18,75.89 43.51,73.23 35.81,73.23 35.28,73.76 32.84,73.76 32.77,73.84
  Top 0.406: R6.2 140.03,86.03 AIO_PO_CONN.5
AI9  (via drill 0.6)
  Top 0.254: SBRIO_ANALOG.P$5 29.04,76.73 31.09,76.73 32.99,78.64 32.99,91.75 43.36,102.11 83.52,102.11 88.47,97.16 103.86,97.16 106.53,99.82 v123.22,99.82 | v128.47,89.31 129.06,88.72 R7.2
  Top 0.406: R7.2 141.63,88.88 142.19,88.16 142.19,86.41 AIO_PO_CONN.6
  Bottom 0.254: v123.22,99.82 128.47,94.56 v128.47,89.31
AI10  (via drill 0.6)
  Top 0.254: R8.2 130.28,83.41 119.25,72.39 79.63,72.39 79.1,72.92 67.36,72.92 65.99,74.3 49.15,74.3 v49.07,74.37 | v34.59,72.47 30.79,72.47 30.63,72.62 28.93,72.62 SBRIO_ANALOG.P$9
  Top 0.406: R8.2 140.11,83.41 AIO_PO_CONN.7
  Bottom 0.254: v49.07,74.37 45.87,74.37 44.04,72.47 v34.59,72.47
AI11
  Bottom 0.254: SBRIO_ANALOG.P$11 21.56,63.25 R9.2 12.42,56.84 12.42,49.61 11.58,48.77 9.91,48.77 SBRIO_AUX.P$33
AI12
  Bottom 0.254: SBRIO_ANALOG.P$15 22.91,60.6 R10.2 13.03,54.8 13.03,47.85 11.96,46.79 10.06,46.79 9.03,45.76 SBRIO_AUX.P$35
AI13
  Bottom 0.254: SBRIO_ANALOG.P$17 22.88,58.57 R14.2 13.64,53.38 13.64,46.33 12.12,44.81 10.06,44.81 9.01,43.76 SBRIO_AUX.P$37
AI15
  Bottom 0.254: SBRIO_AUX.P$41 8.97,39.76 9.98,40.77 12.72,40.77 14.55,42.6 14.55,51.73 R18.2 19.59,55.24 21.41,55.24 22.94,56.77 25.15,56.77 26.13,57.76 SBRIO_ANALOG.P$23
AMS_OK-
  Top 0.406: SAFETY_CONN.3 90.05,8.85 SAFETY_CONN.4 90.05,12.25 93.95,16.31 93.95,22.55 AMS_U5.C+
AMS_OK_IN  (via drill 0.6)  (1 unrouted)
  Top 0.254: v87.33,52.73 78.33,52.81 76.96,54.18 76.96,58.52 74.79,60.7 5525-3.3YM5-TR(1).P$1
  Bottom 0.254: ACCUMULATOR_CONN.7 139.7,32.56 145.31,38.18 145.31,44.27 143.94,45.64 139.98,45.64 137.31,42.98 106.45,42.98 104.01,40.54 93.65,40.54 89.76,44.42 89.69,50.14 v87.33,52.73
AMS_OUT
  Bottom 0.406: TUB_CONN.6 143.26,57.15 142.11,56.01 140.06,56.01 138,53.95 138,48.92 136.09,47.02 103.13,47.02 IC3.17
AO0
  Top 0.406: F15.1 121.92,70.3 121.92,49.84 121.16,49.07 35.13,49.07 33.6,50.6 33.6,51.82 31.7,53.72 30.1,53.72 SBRIO_ANALOG.P$28
  Bottom 0.254: SBRIO_AUX.P$43 9.92,38.79 12.27,38.79 12.57,39.09 12.57,40.01 15.09,42.52 15.09,44.2 16.46,45.57 24.16,52.81 29.34,52.81 30.07,53.54 SBRIO_ANALOG.P$28
AO1
  Top 0.406: F20.1 123.14,68.95 123.14,48.23 122.76,47.85 33.76,47.85 32.84,48.77 32.84,51.28 32.37,51.76 SBRIO_ANALOG.P$30
  Bottom 0.254: SBRIO_AUX.P$45 9.86,36.73 11.58,36.73 13.11,38.25 13.11,39.7 15.7,42.29 15.7,43.74 22.78,50.83 29.18,50.83 30.07,51.71 SBRIO_ANALOG.P$30
AO2
  Top 0.406: F21.1 124.28,67.4 124.28,47.24 123.37,46.33 32.99,46.33 31.77,47.55 31.77,49 31.02,49.76 SBRIO_ANALOG.P$32
  Bottom 0.254: SBRIO_AUX.P$47 9.96,34.82 11.66,34.82 12.19,35.36 12.19,36.35 13.72,37.87 13.72,39.4 16.08,41.91 16.08,43.28 21.72,48.77 29.26,48.77 30.07,49.57 SBRIO_ANALOG.P$32
AO3
  Top 0.406: F22.1 132.95,73.14 125.58,65.76 125.42,46.71 124.05,45.34 32.48,45.34 SBRIO_ANALOG.P$34
  Bottom 0.254: SBRIO_AUX.P$49 9.9,32.77 11.96,32.77 12.72,33.53 12.72,36.2 14.17,37.64 14.17,39.09 16.54,41.45 16.54,43.13 20.27,46.86 28.8,46.79 29.77,47.76 SBRIO_ANALOG.P$34
BRAKE_PRESS_IN_1  (via drill 0.6)
  Top 0.254: BSPD_CONN.6 91.64,94.67 89.53,96.77 87.1,96.77 82.3,101.58 43.97,101.58 33.6,91.21 33.6,77.95 30.4,74.75 29.72,74.75 29.11,74.14 29.11,73.38 28.42,72.69 27.66,72.69 27.05,72.31 27.05,71.02 27.58,70.71 29.11,70.71 SBRIO_ANALOG.P$12
  Top 0.406: TUB_CONN.11 136.85,49.53 136.09,48.77 136.09,46.94 132.74,43.59 R26.2 127.25,43.59 126.72,44.12 126.72,63.7 v131.29,68.28 | BSPD_CONN.6 95.25,86.64 104.47,86.64 108.05,90.22 108.05,95.94 109.5,97.38 134.04,97.38 136.32,95.1 v136.32,94.11
  Bottom 0.406: BSPD_CONN.5 94.14,92.75 BSPD_CONN.6 | v136.32,94.11 136.32,73.3 v131.29,68.28
BRAKE_PRESS_IN_2  (via drill 0.6)  (1 unrouted)
  Top 0.406: TUB_CONN.12 142.22,50.83 136.78,50.83 135.03,49.07 135.03,47.24 133.93,46.15 R19.2 130.02,46.15 127.86,48.31 127.86,63.17 v132.82,68.12 | BSPD_CONN.4 96.64,89.82 98.6,87.86 103.1,87.86 106.53,91.29 106.53,97.08 108.2,98.75 137.01,98.75 138.84,96.93 v138.84,94.11
  Bottom 0.406: BSPD_CONN.3 99.14,92.75 BSPD_CONN.4 | v138.84,94.11 138.84,74.14 v132.82,68.12
BSPD_OK+
  Top 0.406: BSPD_U4.C+ 84.82,21.47 SAFETY_CONN.2 85.05,8.85 SAFETY_CONN.1
BSPD_OK_IN  (2 unrouted)
  Bottom 0.406: BSPD_CONN.1 104.14,92.75 BSPD_CONN.2
BSPD_OUT
  Bottom 0.406: TUB_CONN.4 142.98,59.69 141.96,58.45 139.6,58.45 133.5,52.43 IC3.13
BUZZER_OUT
  Bottom 0.406: TUB_CONN.7 139.95,54.61 139.14,53.8 139.14,46.94 138.07,45.87 103.05,45.87 IC3.18
CAN_GND
  Top 0.254: ACCUMULATOR_CONN.S4 134.55,19.36 132.59,19.36 132.28,19.66 132.28,23.24 131.93,23.6 SBRIO_CAN.P$6 SBRIO_CAN.P$3
  Top 0.406: TUB_CONN.10 146.23,49.35 146.23,25.07 149.1,22.2 ACCUMULATOR_CONN.S2 ACCUMULATOR_CONN.S4 141.2,18.19 141.2,10.97 139.75,9.53 ACCUMULATOR_CONN.1
  Bottom 0.406: ACCUMULATOR_CONN.S3 139.7,8.25 ACCUMULATOR_CONN.1 141.05,9.53 142.19,8.38 142.19,5.94 143.87,4.27 147.52,4.27 ACCUMULATOR_CONN.S1
CAN_H
  Top 0.254: ACCUMULATOR_CONN.5 132.84,14.61 129.69,17.75 129.69,18.97 128.7,19.96 128.7,20.7 SBRIO_CAN.P$7
  Bottom 0.406: ACCUMULATOR_CONN.5 140.89,15.8 140.89,24.08 146.3,29.49 146.3,48.77 144.17,50.9 142.57,50.9 141.4,52.07 TUB_CONN.9
CAN_L
  Bottom 0.254: SBRIO_CAN.P$2 133.88,25.68 133.88,21.95 136.32,19.51 137.85,19.51 138.46,18.9 138.46,15.09 137.16,13.79 ACCUMULATOR_CONN.4
  Bottom 0.406: ACCUMULATOR_CONN.4 140.36,13.34 141.5,14.48 141.5,23.62 146.99,29.11 146.99,51.13 TUB_CONN.8 143.74,54.61
DC_DC_DISABLE  (via drill 0.6)
  Top 0.406: TUB_CONN.1 140.97,67.74 145.24,72.01 145.24,90.45 142.95,92.73 127.64,92.73 121.54,86.64 106.22,86.64 104.93,85.34 92.96,85.34 90.68,83.06 90.68,78.72 89.69,77.72 46.63,77.72 42.98,74.07 38.25,74.07 35.13,77.19 35.13,81.76 v35.2,81.84
  Bottom 0.406: v35.2,81.84 33.38,83.67 25.68,83.67 25.63,83.72 F18.1
DIO0  (1 unrouted)
  Bottom 0.254: GYRO.2 72.36,92.17 70.48,90.3 65.46,90.3 62.26,93.5 SBRIO_MEZZANINE.228
DIO1  (2 unrouted)
DIO4  (1 unrouted)
DIO5
  Bottom 0.254: SBRIO_MEZZANINE.180 52.93,92.73 53.19,92.73 55.32,90.6 55.32,80.62 60.27,75.67 91.06,75.67 92.51,77.11 92.51,78.94 93.17,79.6 IC2.7
DIO6
  Bottom 0.254: SBRIO_MEZZANINE.174 50.83,92.66 51.13,92.35 52.96,92.35 54.86,90.45 54.86,80.47 60.12,75.21 91.21,75.21 93.07,77.06 IC2.5
DIO7  (1 unrouted)
  Bottom 0.254: SBRIO_MEZZANINE.162 48.28,92.21 C20.1
DIO8
  Bottom 0.254: SBRIO_MEZZANINE.156 47.02,93.12 45.87,91.97 45.87,91.06 48.46,88.47 48.46,78.49 48.92,78.03 50.83,78.03 54.33,74.52 54.33,60.81 57.84,57.3 88.92,57.3 91.52,59.89 91.52,66.6 92.92,68 IC1.9
DIO9
  Bottom 0.254: SBRIO_MEZZANINE.144 44.48,90.25 45.19,89.53 45.64,89.53 47.24,87.94 47.24,78.03 48.39,76.89 50.22,76.89 52.96,74.14 52.96,60.2 57.15,56.01 89.49,56.01 IC1.3
DIO10
  Bottom 0.254: SBRIO_MEZZANINE.138 43.2,90.98 45.03,89.15 45.49,89.15 46.86,87.78 46.86,77.8 48.16,76.5 50.06,76.5 52.58,73.99 52.58,59.97 57,55.55 88.7,55.55 90.68,53.57 93.77,53.57 IC3.9
DIO11  (1 unrouted)
DIO12
  Bottom 0.254: U1.P$5 41.22,90.26 41.22,91.06 40.84,91.44 40.08,91.44 39.4,92.13 SBRIO_MEZZANINE.120
DIO16
  Bottom 0.254: ACCEL.7 60.35,90.72 60.35,97.69 60.66,97.99 62.87,97.99 63.48,97.38 SBRIO_MEZZANINE.231
DIO17  (1 unrouted)
DIO18  (via drill 0.6)  (1 unrouted)
  Top 0.254: v70.03,91.52 v67.97,89.46
  Bottom 0.254: GYRO.3 v70.03,91.52 | v67.97,89.46 67.36,88.85 67.13,88.85 66.83,88.54 63.78,88.54 61.8,86.57 ACCEL.13
DIO32
  Bottom 0.254: SBRIO_MEZZANINE.221 61.16,94.84 61.72,95.4 62.48,95.4 62.87,95.02 62.87,94.72 63.32,94.26 64.92,94.26 65,94.18 65.38,93.65 65.38,92.35 65.99,91.9 68.12,91.9 69.19,92.96 69.19,94.18 69.43,94.43 GYRO.5
DIO37
  Bottom 0.254: SBRIO_MEZZANINE.179 52.76,94.18 54.94,94.18 55.32,93.8 55.32,91.21 55.78,90.75 55.78,80.85 60.5,76.12 90.83,76.12 92.13,77.42 92.13,81.61 92.66,82.14 IC2.9
DIO38
  Bottom 0.254: SBRIO_MEZZANINE.167 49.55,94.46 50.14,93.88 50.14,92.35 50.52,91.97 52.73,91.97 54.48,90.22 54.48,80.16 59.82,74.83 93.6,74.83 IC2.3
DIO39  (via drill 0.6)  (1 unrouted)
  Top 0.254: v51.36,89.99 55.93,85.42 57.53,85.42 59.28,83.67 64.16,83.67
  Bottom 0.254: SBRIO_MEZZANINE.161 48.92,94.21 48.92,92.2 49.53,91.59 50.9,91.59 51.6,90.89 5525-3.3YM5-TR(4).P$3 51.36,90.55 v51.36,89.99
DIO40
  Bottom 0.254: SBRIO_MEZZANINE.149 46.33,94.26 46.33,92.96 45.49,92.13 45.49,90.91 48.01,88.39 48.01,78.33 48.69,77.65 50.67,77.65 53.87,74.45 53.87,60.66 57.61,56.92 89.15,56.92 91.9,59.66 91.9,63.7 93.66,65.46 IC1.7
DIO41
  Bottom 0.254: SBRIO_MEZZANINE.143 45.11,94.21 45.11,90.68 47.62,88.16 47.62,78.18 48.54,77.27 50.44,77.27 53.42,74.3 53.42,60.43 57.38,56.46 89.31,56.46 92.35,59.51 92.35,61.72 93.55,62.92 IC1.5
DIO42
  Bottom 0.254: SBRIO_MEZZANINE.131 41.94,94.46 42.52,93.88 42.52,90.91 44.73,88.7 45.41,88.7 46.48,87.63 46.48,77.57 47.93,76.12 49.91,76.12 52.12,73.91 52.12,59.51 56.62,55.02 88.24,55.02 92.2,51.05 93.8,51.05 IC3.7
DIO43
  Bottom 0.254: SBRIO_MEZZANINE.125 40.66,94.44 41.22,93.88 41.22,92.43 42.14,91.52 42.14,90.68 44.5,88.32 45.26,88.32 46.02,87.55 46.02,77.19 47.55,75.67 49.76,75.67 51.59,73.84 51.59,59.28 56.39,54.48 87.94,54.48 90.37,52.05 90.37,51.99 IC3.5
DIO44
  Bottom 0.254: SBRIO_MEZZANINE.113 37.41,94.13 37.41,91.36 38.8,89.98 R16.1
DIO45
  Bottom 0.254: R15.1 27.84,88.57 32.38,93.12 32.38,93.88 32.69,94.18 36.2,94.18 SBRIO_MEZZANINE.107
DIO48  (1 unrouted)
DIO64
  Bottom 0.254: SBRIO_MEZZANINE.226 62.53,96.11 63.17,95.48 68.5,95.48 68.89,95.1 70.04,95.1 GYRO.6
DIO65
  Bottom 0.254: SBRIO_MEZZANINE.220 61.04,96.06 61.04,96.01 61.72,96.7 67.89,96.7 68.94,95.65 GYRO.7
DIO81  (via drill 0.6)
  Top 0.254: v66.22,90.83 64.69,89.31 v63.78,89.31 | v63.02,90.6 65.53,93.12 65.53,96.93 66.52,97.92 v69.19,97.92
  Bottom 0.254: v66.22,90.83 69.19,90.83 69.27,90.91 69.27,92.05 69.49,92.28 70.06,92.28 GYRO.4 70.03,93.35 68.2,91.52 64.77,91.52 62.87,93.42 62.87,93.8 62.48,94.18 61.95,94.18 61.65,93.88 61.65,91.97 v63.02,90.6 | v63.78,89.31 61.77,87.29 ACCEL.12 | v69.19,97.92 69.8,98.53 69.8,98.91 69.42,99.29 62.94,99.29 62.31,99.92 SBRIO_MEZZANINE.223
DIO83  (1 unrouted)
DIO85  (1 unrouted)
DIO86  (1 unrouted)
DIO87  (1 unrouted)
DIO88  (1 unrouted)
  Bottom 0.406: 49.53,99.95 SBRIO_MEZZANINE.163
DIO90
  Bottom 0.254: SBRIO_MEZZANINE.145 45.11,99.29 44.04,99.29 43.81,99.06 43.81,95.78 43.51,95.48 31.39,95.48 31.17,95.25 31.17,92.81 27.89,89.53 8.99,89.53 7.7,88.24 7.7,85.57 8.38,84.89 13.26,84.89 14.02,84.12 14.02,75.06 10.89,71.93 SBRIO_AUX.P$10
DIO91
  Bottom 0.254: SBRIO_MEZZANINE.133 42.6,99.31 42.6,97.16 42.22,96.77 30.25,96.77 29.87,96.39 29.87,92.81 27.13,90.07 8.84,90.07 7.16,88.39 7.16,85.34 8.15,84.35 13.03,84.35 13.56,83.82 13.56,75.59 11.73,73.76 SBRIO_AUX.P$8
DIO92
  Bottom 0.254: SBRIO_MEZZANINE.127 41.3,99.29 41.3,98.3 41,97.99 28.88,97.99 28.57,97.69 28.57,92.81 26.36,90.6 8.61,90.6 6.55,88.54 6.55,85.19 10.82,80.92 12.8,80.92 13.11,80.62 13.11,77.65 12.27,76.81 9.98,76.81 8.93,75.76 SBRIO_AUX.P$5
DIO93
  Bottom 0.254: SBRIO_MEZZANINE.115 38.76,99.29 27.66,99.29 27.36,98.98 27.36,92.81 25.6,91.06 8.38,91.06 6.02,88.7 6.02,79.25 7.51,77.76 SBRIO_AUX.P$3
DIO94  (1 unrouted)
  Bottom 0.254: SBRIO_MEZZANINE.109 39.09,100.89 82.07,100.89 87.25,95.71 87.25,93.5 84.89,91.14 84.89,83.13 83.97,82.22 80.31,82.22 79.28,81.19 C19.1
DIO95  (via drill 0.6)
  Top 0.406: v83.13,73.91 v83.13,76.96
  Bottom 0.254: SBRIO_MEZZANINE.97 37.24,101.58 82.22,101.58 87.78,96.01 87.78,93.04 85.42,90.68 85.42,82.74 C18.1 | 83.1,70.98 5225-3.3M5-TR(5).P$3
  Bottom 0.406: 83.1,70.98 83.1,73.88 v83.13,73.91 | v83.13,76.96 83.13,80.38 C18.1
DIO_GND  (via drill 0.6)  (5 unrouted)
  Top 0.254: SBRIO_ANALOG.P$22 29.11,58.8 29.11,57.15 30.07,56.19 SBRIO_ANALOG.P$26 SBRIO_ANALOG.P$25 SBRIO_ANALOG.P$27 SBRIO_ANALOG.P$29 SBRIO_ANALOG.P$31 SBRIO_ANALOG.P$33 SBRIO_ANALOG.P$35 SBRIO_ANALOG.P$37 SBRIO_ANALOG.P$39 SBRIO_ANALOG.P$41 SBRIO_ANALOG.P$43 SBRIO_ANALOG.P$45 SBRIO_ANALOG.P$47 SBRIO_ANALOG.P$49 | v30.07,71.29 42.17,71.29 3.3V_REG.9 | C10.2 41.77,52.02 C12.1
  Top 0.406: U$3.2 67.55,57.66 U$3.4 66.65,58.32 C11.2 | C10.2 34.75,52.12 34.29,52.58 34.29,54.03 32.54,55.78 30.09,55.78 SBRIO_ANALOG.P$26
  Bottom 0.254: SBRIO_ANALOG.P$22 SBRIO_ANALOG.P$19 28.07,62.05 29.03,63.02 29.03,64.72 SBRIO_ANALOG.P$16 SBRIO_ANALOG.P$13 29.11,68.8 29.11,70.33 v30.07,71.29 SBRIO_ANALOG.P$10 SBRIO_ANALOG.P$7 29.11,74.8 29.11,76.8 SBRIO_ANALOG.P$4 | ACCEL.5 ACCEL.4 58.64,88.92 57.61,88.92 57.3,88.62 57.3,87.63 57.64,87.29 ACCEL.2
  Bottom 0.406: SBRIO_ANALOG.P$1 SBRIO_ANALOG.P$4 | C8.2 C7.2
E-STOP_OK  (via drill 0.6)
  Top 0.254: v86.11,84.51 84.73,83.13 v53.57,83.13
  Bottom 0.254: AIO_PO_CONN.4 144.63,88.75 144.63,90.83 134.49,100.97 92.2,100.97 91.44,100.2 91.44,92.66 86.11,87.33 v86.11,84.51 | v53.57,83.13 52.35,84.35 52.35,86.41 53.02,87.09 R3.1 53.6,88.06 5525-3.3YM5-TR(4).P$1
GLV+  (via drill 0.6)
  Top 0.254: F3.3 F3.4 60.67,23.09 v72.31,23.09
  Top 0.406: BSPD_U4.S1 88.54,21.79 88.54,25.98 88.32,26.75 83.9,26.75 83.21,27.43 83.21,36.65 83.67,37.11 87.25,37.11 88.54,35.81 88.54,33.45 89.76,32.23 89.76,30.94 90.98,29.72 91.62,29.72 AMS_U5.C- 91.75,30.63 | 91.75,30.63 91.67,30.56 91.67,29.64 | 91.75,30.63 91.75,31.47 89.53,33.68 89.53,35.81 90.75,37.03 115.04,37.03 SBRIO_U1.S1
  Bottom 0.254: v72.31,23.09 75.72,19.68 BSPD_U4.S1
GND  (via drill 0.6)  (20 unrouted)
  Top 0.254: R13.1 31.55,61.99 31.55,65 | 31.55,65 31.55,66.06 30.94,66.67 26.75,66.67 23.32,63.25 v23.32,63.17 | v75.36,92.81 78.11,95.56 v79.63,95.56 | LATCH_CONN.8 127.99,13.92 SBRIO_U1.C- | R20.1 130.87,41.1 R21.1 130.79,43.51 R26.1 130.87,46.08 R19.1 | 5525-3.3YM5-TR(2).P$2 73.68,69.89 | 73.68,69.89 C17.2 | 73.68,69.89 72.54,69.89 R2.2 68.56,65.91 R5.2 | BSPD_U4.C- 88.16,28.35 88.16,27.36 88.7,27.36 89.08,26.98 89.08,19.74 90.6,18.21 92.58,18.21 93.34,18.97 93.34,20.88 90.22,24 90.22,26.21 93.8,29.79 93.8,30.48 90.14,34.14 90.14,35.36 90.75,35.97 93.8,35.97 95.4,34.37 95.4,32.54 IMD_U6.C- | U$8.V1 36.63,22.63 37.34,22.63 40.08,25.38 42.75,25.38 44.81,23.32 44.81,19.66 45.57,18.9 48.77,18.9 49.99,20.12 49.99,27.58 49.11,28.46 U$2.P$2 49.23,29.54 49.23,31.85 48.48,32.6 U$1.P$2 | v16.46,28.57 13.28,31.76 SBRIO_AUX.P$50 SBRIO_AUX.P$48 SBRIO_AUX.P$46 SBRIO_AUX.P$44 SBRIO_AUX.P$42 SBRIO_AUX.P$40 | SBRIO_AUX.P$34 SBRIO_AUX.P$32 | SBRIO_AUX.P$32 SBRIO_AUX.P$31 | SBRIO_AUX.P$32 SBRIO_AUX.P$30 | SBRIO_AUX.P$30 SBRIO_AUX.P$29 | SBRIO_AUX.P$30 SBRIO_AUX.P$28 | SBRIO_AUX.P$28 SBRIO_AUX.P$27 | SBRIO_AUX.P$28 10.94,53.76 11.05,53.65 11.05,55.6 SBRIO_AUX.P$26 SBRIO_AUX.P$24 SBRIO_AUX.P$22 SBRIO_AUX.P$20 SBRIO_AUX.P$18 SBRIO_AUX.P$17 | SBRIO_AUX.P$25 SBRIO_AUX.P$23 SBRIO_AUX.P$21 SBRIO_AUX.P$19 SBRIO_AUX.P$17 | SBRIO_AUX.P$17 SBRIO_AUX.P$15 SBRIO_AUX.P$13 SBRIO_AUX.P$11 SBRIO_AUX.P$9 SBRIO_AUX.P$7 | v39.62,83.44 39.62,75.67 v38.86,74.91 | v32.99,65.23 31.77,65.23 31.55,65
  Bottom 0.254: v75.36,92.81 75.36,88.85 73.85,87.34 C5.2 C6.2 65.43,87.34 C14.1 64.17,87.64 59.28,82.75 59.28,80.23 R35.1 58.29,78.87 56.16,81 56.16,90.22 56.54,90.6 56.54,95.17 56.24,95.48 48.01,95.48 47.62,95.1 47.62,91.17 C20.2 49.91,88.89 5525-3.3YM5-TR(4).P$2 51.6,87.6 R3.2 | v79.63,95.56 78.96,96.22 GYRO.13 GYRO.12 GYRO.11 GYRO.10 GYRO.9 GYRO.8 68.83,97.38 SBRIO_MEZZANINE.237 | R25.1 R24.1 147.55,12.09 151.71,7.92 151.71,4.95 149.05,2.29 129.55,2.29 LATCH_CONN.7 125.49,8.85 LATCH_CONN.8 | R22.1 125.73,29.7 125.73,26.59 123.9,24.77 SBRIO_U1.C- 112.06,29.84 SBRIO_U2.C- 110.67,29.97 INTERLOCKS_U3.C- 104.65,29.84 IMD_U6.C- | R17.1 81.35,35.16 BSPD_U4.C- | U$8.V1 LATCH_U7.COIL_1 16.46,28.55 v16.46,28.57 | SBRIO_AUX.P$40 SBRIO_AUX.P$38 10.23,43.76 9.22,42.75 8.31,42.75 7.77,43.28 7.77,44.35 8.15,44.73 | 8.15,44.73 9.14,44.73 10.17,45.76 SBRIO_AUX.P$36 | SBRIO_AUX.P$34 10.19,47.76 9.22,46.79 8.23,46.79 7.85,46.41 7.85,45.03 8.15,44.73 | SBRIO_AUX.P$18 19.62,63.76 R9.1 | R18.1 R14.1 R10.1 R9.1 | v23.32,63.17 22.63,62.48 20.73,62.48 20.13,63.08 R9.1 | 4401-7-F(2).P$3 38.73,86.49 | 38.73,86.49 U1.P$2 | 4401-7-F(1).P$3 15.47,86.94 15.09,86.94 14.48,86.33 14.48,74.91 11.96,72.39 11.96,71.25 11.43,70.71 10.13,70.71 9.09,71.76 SBRIO_AUX.P$9 | 38.73,86.49 38.73,85.48 39.17,85.04 39.17,83.9 v39.62,83.44 | v38.86,74.91 35.28,74.91 33.53,73.15 33.53,65.76 v32.99,65.23 | IC3.2 94.18,44.73 95.63,46.18 95.63,49.15 95.02,49.76 93.88,49.76 IC3.6
  Bottom 0.406: 5225-3.3M5-TR(5).P$2 81.55,70.93 82.75,69.72 89,69.72 92.43,73.15 93.8,73.15 IC2.2
  pour Bottom: 0,102.87 153.7,102.87 153.7,0 0,0
IMD_OK+
  Top 0.406: SAFETY_CONN.5 95.05,8.85 SAFETY_CONN.6 95.78,11.35 99.97,15.7 99.97,22.89 IMD_U6.C+
IMD_OK_IN  (via drill 0.6)  (1 unrouted)
  Top 0.406: v76.5,68.35 75.89,68.96 73.08,68.96 71.65,67.54 R2.1
  Bottom 0.406: 5225-3.3M5-TR(5).P$1 81.52,68.35 v76.5,68.35
IMD_OUT
  Bottom 0.406: TUB_CONN.5 139.75,57.15 136.78,54.18 136.7,54.18 133.43,50.9 103.05,50.9 IC3.14
INTER_OK+
  Top 0.406: SAFETY_CONN.7 100.05,8.85 SAFETY_CONN.8 101.11,11.35 106.6,16.99 106.6,23.06 INTERLOCKS_U3.C+
LAP_TIMER_IN  (1 unrouted)
  Bottom 0.406: U1.P$8 44.5,85.48 44.5,84.35 43.88,83.73 R36.2
LATCH_LED+
  Top 0.406: LATCH_CONN.6 122.99,8.85 LATCH_CONN.5 118.48,3.89 17.83,4.65 14.5,7.98 LATCH_U7.NC_2
LATCH_OK  (via drill 0.6)
  Top 0.254: R5.1 73.78,67.89 v73.84,67.89 | v74.68,70.94 75.62,71.89 5525-3.3YM5-TR(2).P$1 119.67,71.89 129.69,81.92 139.98,81.92 140.74,81.15 142.11,81.15 AIO_PO_CONN.8
  Bottom 0.254: v73.84,67.89 74.68,68.73 v74.68,70.94
LATCH_SW_IN
  Top 0.254: LATCH_CONN.1 111.51,4.65 117.04,4.65 121.01,8.99 121.01,11.96 121.84,12.8 123.67,12.8 124.51,11.96 124.51,7.77 119.94,3.2 2.9,3.81 1.07,5.64 1.07,17.3 2.21,18.44 5.33,18.44 5.87,17.91 5.87,12.72 2.97,9.83 2.97,7.24 4.12,6.1 4.88,6.1 10.44,11.66 24.16,11.66 27.96,7.85 29.34,7.85 LATCH_U7.COIL_2
  Top 0.406: LATCH_CONN.2 112.99,8.85 LATCH_CONN.1 | LATCH_U7.COIL_2 29.18,8.01 24.92,12.27 8.76,12.27 LATCH_U7.NO_2 4.42,8.09 4.42,9.91 7.16,12.65 7.16,16.69 10.29,19.81 27.36,19.81 32.08,24.54 36.42,24.54 39.47,27.58 42.75,27.58 45.76,30.6 U$1.P$1
LATCH_SW_OUT
  Top 0.406: LATCH_CONN.3 117.99,8.85 LATCH_CONN.4 113.26,16.08 109.96,16.08 107.9,18.14 107.9,30.02 106.07,31.85 102.11,31.85 100.43,33.53 98.91,33.53 98.09,34.34 IMD_U6.S2 102.01,34.92 103.94,32.99 119.41,32.99 120.47,34.06 120.47,36.65 117.96,39.17 82.53,38.94 81.23,37.87 81.23,33.98 76.12,28.88 76.12,23.77 58.75,6.4 27.96,6.4 23.47,10.9 12.39,10.9 LATCH_U7.CENTER_2
N$1
  pour Top: -0.08,102.87 153.7,102.87 153.7,-0.08 -0.08,-0.08
N$2
  Top 0.406: SBRIO_U2.S1 SBRIO_U1.S2
N$3
  Top 0.406: F15.2 140.21,80.77 AIO_PO_CONN.9
N$4
  Top 0.254: SBRIO_ANALOG.P$2 28.75,81.08 27.51,81.08 26.59,80.16 26.59,69.11 27.2,68.81 31.01,68.81 34.39,65.43 R13.2 35.25,59.59 5238B-7-F.P$2
N$6
  Top 0.406: F20.2 139.52,78.18 139.98,78.64 142.14,78.64 AIO_PO_CONN.10
N$7
  Top 0.406: SBRIO_U2.S2 109.37,36.35 97,36.35 96.01,35.36 96.01,32.92 97.46,31.47 100.05,31.47 100.51,31.01 100.51,23.7 104.39,19.81 INTERLOCKS_U3.S1
N$8
  Top 0.406: BSPD_U4.S2 86.67,32.66 89.61,29.41 89.76,25.98 89.76,21.97 AMS_U5.S1
N$9
  Top 0.406: F21.2 139.09,75.59 AIO_PO_CONN.11
N$10
  Top 0.406: F22.2 139.37,73.08 139.9,73.61 141.58,73.61 142.19,74.22 142.19,76.15 AIO_PO_CONN.12
N$13
  Top 0.406: AMS_U5.S2 94.87,31.8 94.87,22.55 97.74,19.68 IMD_U6.S1
N$14
  Bottom 0.406: F3.1 | U$8.A F3.1 | F3.1 F3.2
N$20
  Top 0.406: F16.2 142.24,91.44 AIO_PO_CONN.2
N$37
  Bottom 0.406: GYRO.14 78.24,95.58 80.54,93.27 80.54,90.22 75.82,85.5 65.95,85.5 C14.2 65,85.81 64.64,85.81 C13.2
N$38
  Bottom 0.406: C13.1 62.19,79.02 R35.2
N$41  (1 unrouted)
  Bottom 0.406: BSPD_CONN.9 84.14,92.75 BSPD_CONN.10
N$54
  Bottom 0.254: 4403-7-F.P$2 25.74,88.16 32.08,88.16 32.23,88.32 R11.2
N$56  (via drill 0.6)
  Top 0.254: v79.25,53.57 80.85,53.57 85.95,58.67 88.08,58.67 F17.2
  Bottom 0.254: 4403-7-F.P$1 33.18,85.31 36.35,82.14 36.35,77.42 37.95,75.82 46.56,75.82 47.24,75.13 49.68,75.13 51.21,73.61 51.21,58.83 56.08,53.95 78.87,53.95 v79.25,53.57
N$57
  Bottom 0.406: F18.2 21.35,83.77 4403-7-F(2).P$1
N$58
  Bottom 0.254: R12.2 15.67,82.82 4403-7-F(2).P$2
N$60
  Bottom 0.254: 4401-7-F(1).P$2 15.63,89 18.36,89 18.8,88.57 R15.2
N$61
  Bottom 0.254: 4401-7-F(1).P$1 15.54,85.97 R12.1
N$62
  Bottom 0.254: R16.2 40.18,88.5 4401-7-F(2).P$2
N$63
  Bottom 0.254: R11.1 35.12,87.55 4401-7-F(2).P$1
PO2
  Bottom 0.406: AIO_PO_CONN.15 140.97,71.7 130.76,61.49 103.12,61.49 IC1.17
PO3
  Bottom 0.406: IC1.14 103.17,65.3 132.36,65.3 140.74,73.69 142.26,73.69 AIO_PO_CONN.14
PO4
  Bottom 0.406: IC1.13 103.16,66.6 132.64,66.6 AIO_PO_CONN.13
PRECHARGE_DONE+
  Top 0.406: TSMS_CONN.4 77.35,8.85 TSMS_CONN.3
  Bottom 0.406: F1.1 78.96,11.35 TSMS_CONN.4
SBRIO_OK+_1  (via drill 0.6)
  Top 0.254: F2.1 133.15,32.33 145.24,44.42 145.24,49.45 144.09,50.6 143.41,50.6 142.42,51.59 142.42,52.27 141.43,53.26 134.87,53.26 129.01,59.13 128.93,59.13 129.08,59.28 129.08,63.63 132.36,66.9 133.27,66.9 134.26,67.89 134.26,69.34 133.5,70.1 v131.44,70.1
  Bottom 0.254: v131.44,70.1 128.17,74.22 118.95,74.22 113.56,79.6 IC2.14
SBRIO_OK+_1_RELAY_IN
  Top 0.406: SBRIO_U1.C+ 117.17,29.82 F2.2
SBRIO_OK_2_RELAY
  Top 0.406: SBRIO_U2.C+ 113.46,27.43 F14.2
SHIELD
  Top 0.254: SBRIO_CAN.P$5 128.35,22.99 129.54,21.79 129.54,19.86 SBRIO_CAN.P$10 134.52,18.52 ACCUMULATOR_CONN.6
SHUTDOWN_OK+
  Top 0.406: LATCH_U7.NO_1 2.21,13.22 2.21,7.24 3.89,5.56 9.22,5.56 13.72,10.06 21.03,10.06 25.6,5.49 60.88,5.49 70.56,15.16 80.01,15.16 82.37,17.53 82.37,20.19 82.3,20.27 82.3,36.73 83.52,37.95 117.35,37.95 119.25,36.04 119.25,34.06 118.87,33.68 107.44,33.68 106.07,35.05 INTERLOCKS_U3.S2
STEERING_POS  (via drill 0.6)
  Top 0.254: SBRIO_AUX.P$39 9.81,42.67 12.65,42.67 25.07,55.09 25.07,58.52 26.3,59.76 SBRIO_ANALOG.P$21 | v83.59,40.92 119.18,40.92 122.76,37.34 136.4,37.34 TUB_CONN.16
  Bottom 0.254: SBRIO_ANALOG.P$21 29.15,58.67 31.32,58.67 49.3,40.92 R17.2 v83.59,40.92
THROTTLE_IN_1
  Top 0.254: SBRIO_ANALOG.P$18 29.13,64.69 27.28,64.69 22.78,60.2 22.78,55.7 13.79,46.71 7.77,46.71 6.1,45.03 6.1,28.35 8,26.44 33.45,26.44 35.36,28.35 35.36,41.99 36.35,42.98 38.33,42.98 38.41,43.05 | 63.09,43.05 82.68,43.05 83.13,42.6
  Top 0.406: TUB_CONN.13 140.94,47.02 138.53,47.02 134.95,43.43 134.95,40.08 133.32,38.46 R20.2 123.01,38.46 118.87,42.6 83.13,42.6 | 63.09,43.05 38.41,43.05
THROTTLE_IN_2
  Top 0.254: SBRIO_ANALOG.P$20 29.11,62.71 27.43,62.71 24.08,59.36 24.08,55.47 13.26,44.65 7.92,44.65 7.24,43.97 7.24,28.19 8,27.43 33.53,27.43 34.52,28.42 34.52,43.36 35.05,43.89 38.79,43.89 | 62.64,43.89 83.67,43.89 83.74,43.81
  Top 0.406: R21.2 132.59,41.17 | 132.59,41.17 132.99,41.17 133.81,41.99 133.81,43.43 137.16,46.79 137.16,47.55 137.85,48.23 142.57,48.23 TUB_CONN.14 | 38.79,43.89 62.64,43.89 | 83.74,43.81 119.02,43.81 121.69,41.22 132.54,41.22 132.59,41.17
THROTTLE_OK_OUT  (1 unrouted)
TSMS_IN+
  Top 0.406: TSMS_CONN.2 72.35,8.85 TSMS_CONN.1
TSMS_OUT+  (via drill 0.6)
  Top 0.254: SAFETY_CONN.9 102.55,10.88 105.39,13.72 113.39,13.72 115.14,11.96 115.14,8.15 113.23,6.25 113.23,5.79 113.77,5.26 116.51,5.26 119.94,8.69 119.94,12.27 121.23,13.56 124.13,13.56 125.04,12.65 125.04,7.7 119.86,2.52 v44.5,2.52
  Top 0.406: SAFETY_CONN.10 105.05,8.85 SAFETY_CONN.9
  Bottom 0.254: v44.5,2.52 41.12,5.89 U$8.CENTER
TSMS_OUT_CTRL+
  Top 0.406: U$8.V2 47.19,21.21 U$2.P$1 39.87,26.46 36.96,23.55 32.46,23.55 27.66,18.75 12.74,18.75 LATCH_U7.CENTER_1
WS1
  Bottom 0.254: LEVEL_SHIFTER.13 118.11,90.14 U$4.1
WS2
  Bottom 0.254: LEVEL_SHIFTER.12 115.57,88.25 U$4.2
WS3
  Bottom 0.254: LEVEL_SHIFTER.11 113.03,88.85 U$4.3
WS4
  Bottom 0.254: LEVEL_SHIFTER.10 111.06,90.17 U$4.4